# Altium PCB PCB1.PcbDoc
Units mm, origin at the board's own origin, x right, y up, seen from the top; angles counter-clockwise.
Board outline 159.1 x 114.2 mm, 2 copper layers (Top Layer, Bottom Layer); 54 components, 90 nets, 370 pads, 0 vias.
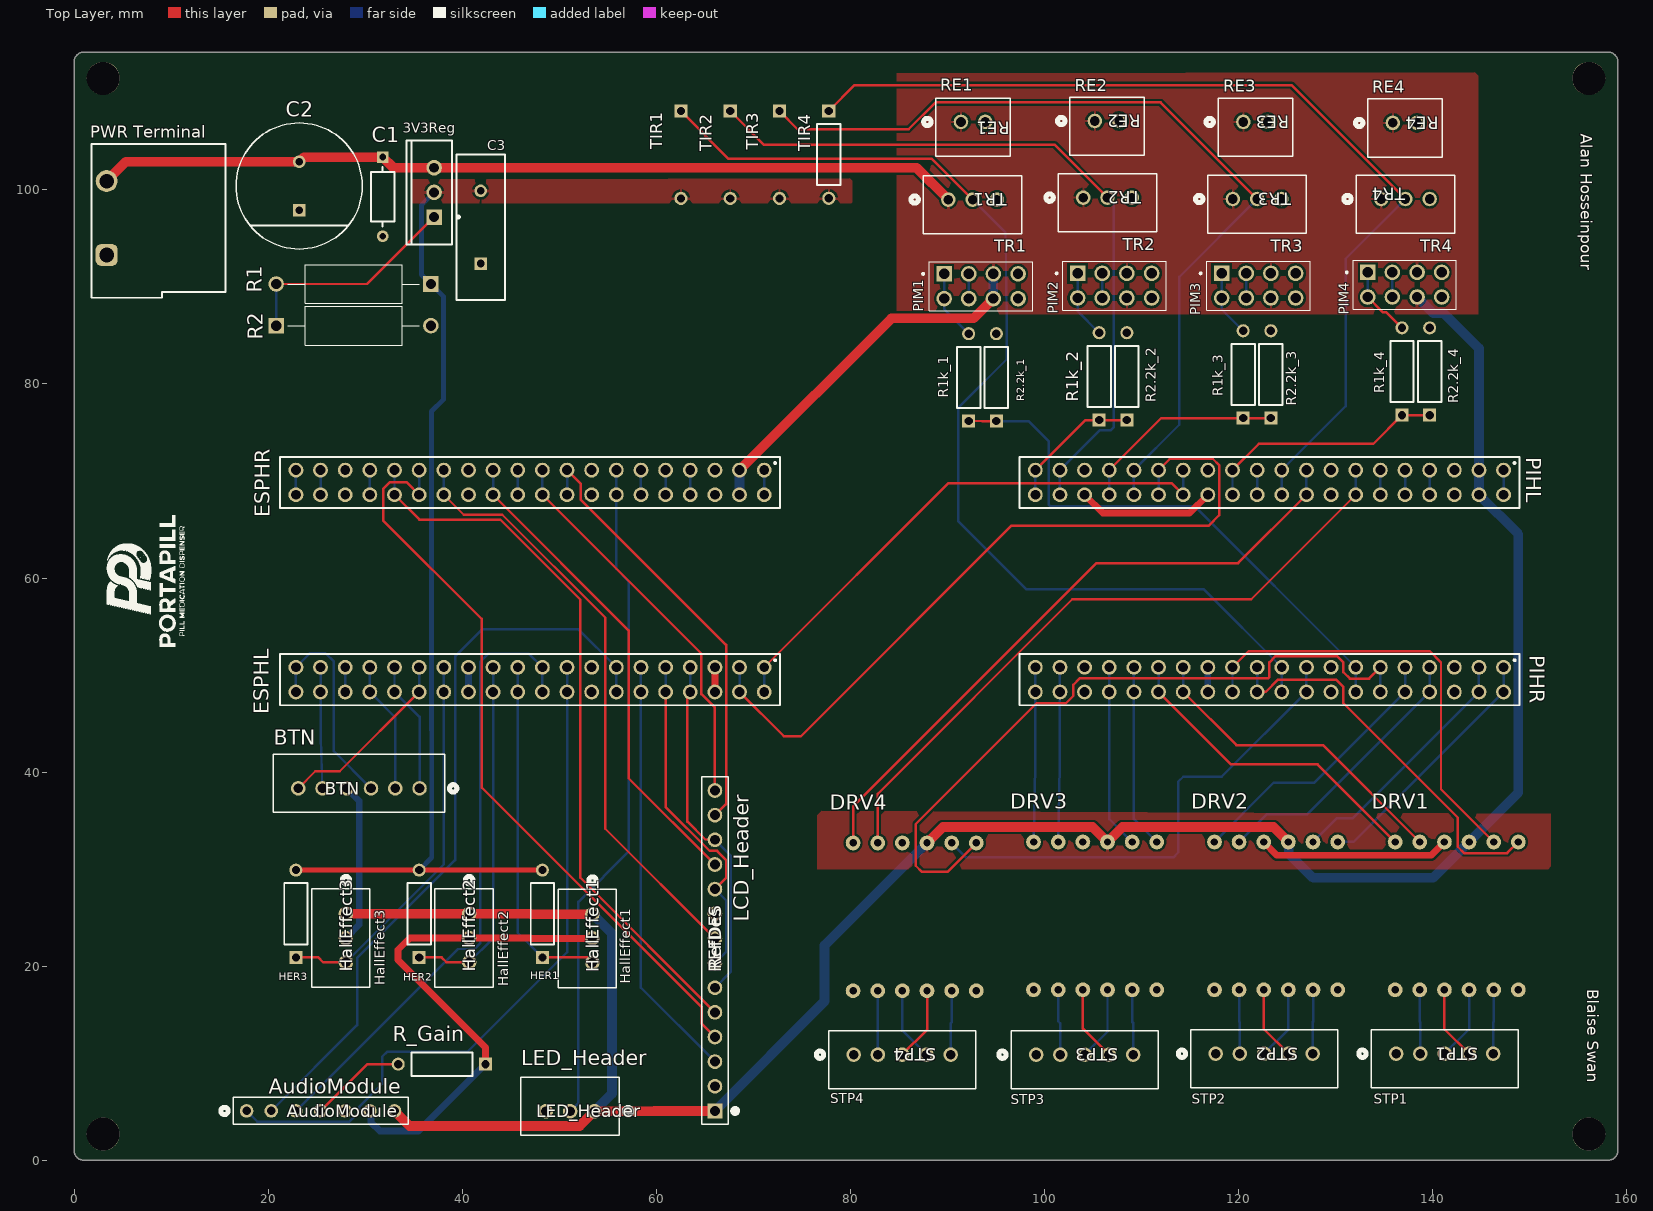
[diagram p0: Top Layer view]
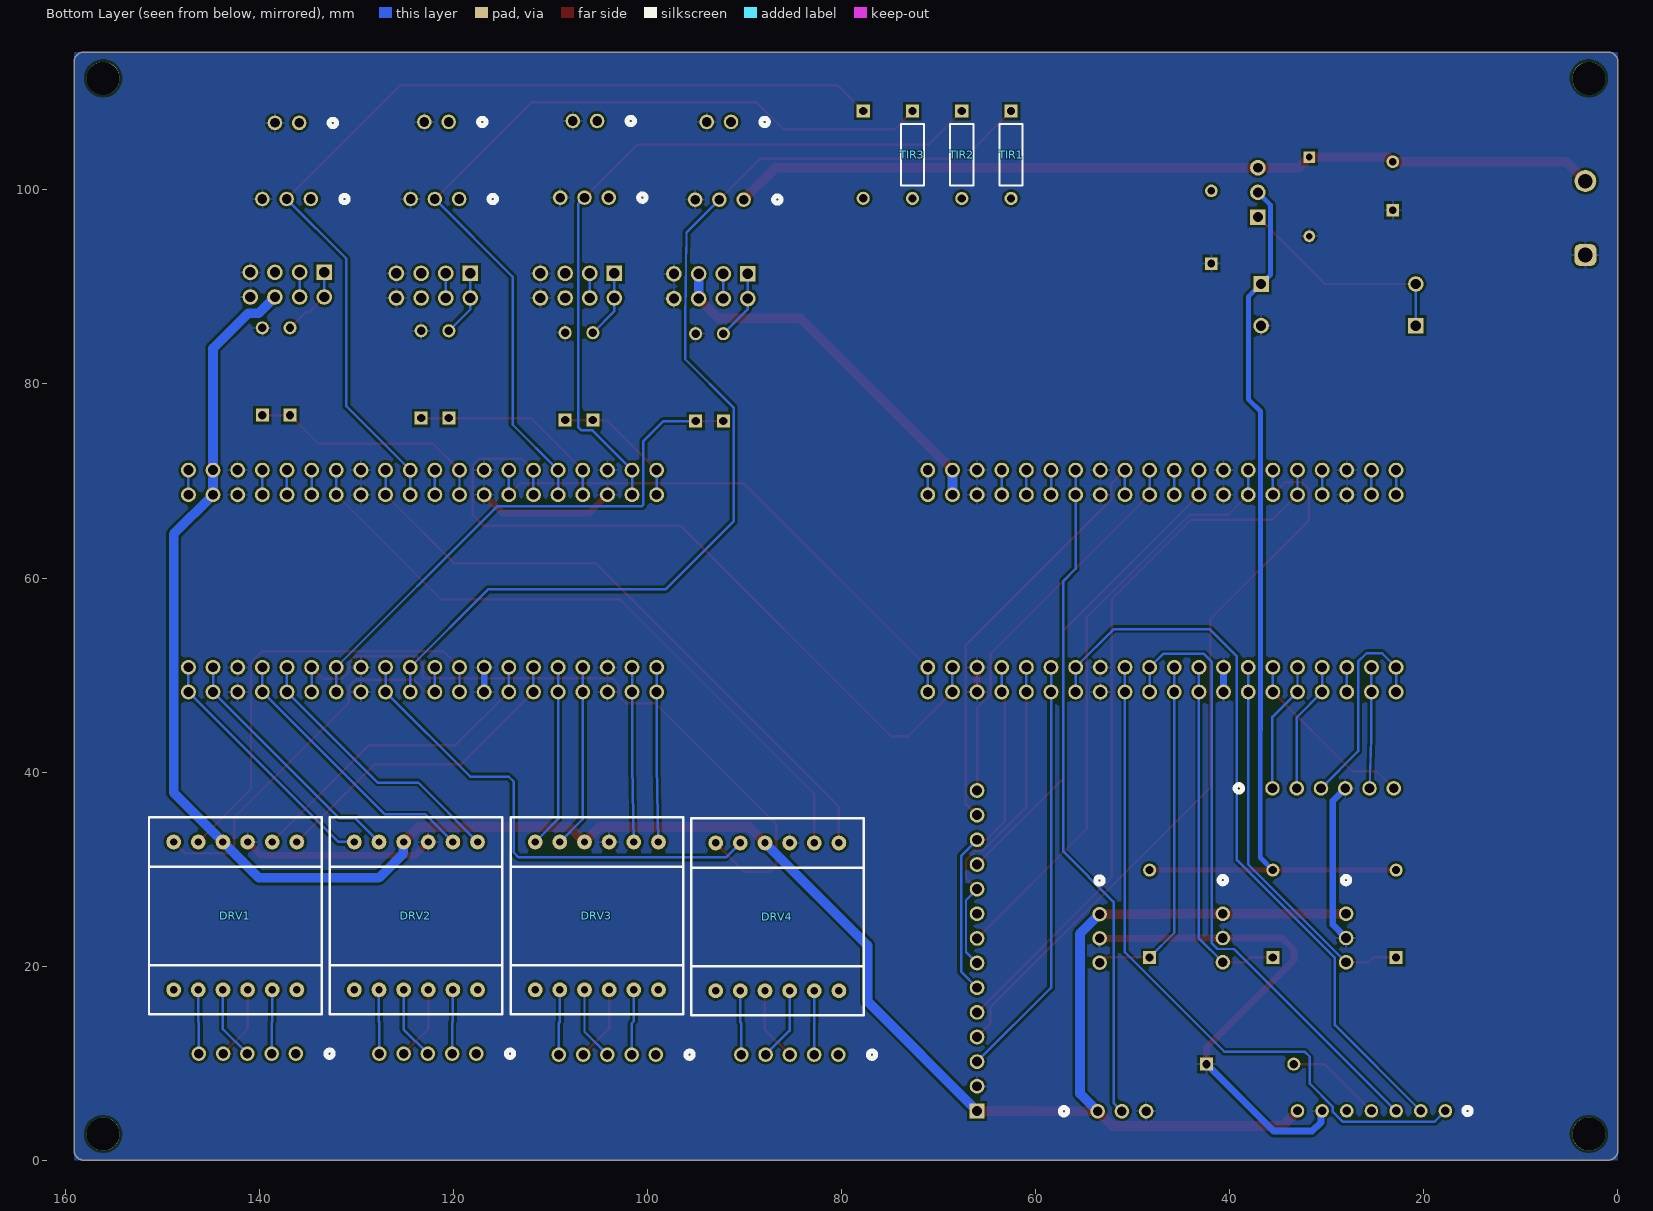
[diagram p1: Bottom Layer view, seen from below]

## Layer stack, top to bottom
Top Solder: solder mask 0.0102, Solder Resist, Dk 3.5
Top Layer: signal copper 0.0356
Dielectric 1: dielectric 0.32, FR-4, Dk 4.8
Bottom Layer: signal copper 0.0356
Bottom Solder: solder mask 0.0102, Solder Resist, Dk 3.5

## Board outline
1,0 cw(c1,1) 0,1 0,113.2 cw(c1,113.2) 1,114.2 158.1,114.2 cw(c158.1,113.2) 159.1,113.2 159.1,1 cw(c158.1,1) 158.1,0

## Design rules (kind name [scope] priority, off if disabled: settings)
Clearance [All] p1: gap=0.254 ignorepadtopadclearanceinfootprint=FALSE
PolygonConnect [All] p1: connectstyle=Relief reliefconductorwidth=0.254 reliefentries=4 polygonreliefangle="90 Angle" airgapwidth=0.254
RoutingVias [All] p1: holewidth=0.711 width=1.27 viastyle="Through Hole" minholewidth=0.711 minwidth=1.27 maxholewidth=0.711 maxwidth=1.27
SolderMaskExpansion [All] p1: expansion=0 istentingtop=FALSE
SupplyNets "Schematic Supply Nets_2" [InNet('3V3')] p1: voltage=0.000
SupplyNets "Schematic Supply Nets_1" [InNet('+5')] p2: voltage=0.000
SupplyNets "Schematic Supply Nets" [InNet('GND')] p3: voltage=0.000
Width Width_2 [InNet('GND')] p1: maxlimit=1 minlimit=0.4 preferedwidth=0.7 minimp=50.000000 maximp=50.000000 favimp=50.000000
Width Width_1 [InNet('3V3')] p2: maxlimit=0.7 minlimit=0.4 preferedwidth=0.5 minimp=50.000000 maximp=50.000000 favimp=50.000000
Width [InNet('+5')] p3: maxlimit=1.2 minlimit=0.5 preferedwidth=1 minimp=50.000000 maximp=50.000000 favimp=50.000000
30 further rules are at their usual default settings.

## Components (designator, comment, footprint, x,y, rotation, side; value= is the part's Value field where it differs from the comment)
3V3Reg "LM317AT/NOPB" NDE0003A 37.1,99.74 r90 top
AudioModule "MAX98357A" CONN07_901471107_MOL 17.78,5.08 r0 top
BTN "B6B-XH-A" CONN_B6B-XH-A_JST 35.6,38.323 r0 top
C1 "0.1uF" FP-C410C104M5U5TA7200-MFG 31.8,99.3 r270 top
C2 "100uF" FP-RAD-TH-D_12_5_0_5-L_25-MFG 23.2,100.4 r90 top
C3 "10uF" FP-DE2_D15_T5_F7_5_d0_6-0-MFG 41.9,96.15 r90 top
DRV1 "DRV8833" DRV8833 136.14,32.8 r270 bottom
DRV2 "DRV8833" DRV8833 117.52,32.8 r270 bottom
DRV3 "DRV8833" DRV8833 98.88,32.8 r270 bottom
DRV4 "DRV8833" DRV8833 80.28,32.7 r270 bottom
ESPHL "2X20 header" 61304021821 46.99,49.53 r180 top locked
ESPHR "2x20 header" 61304021821 46.99,69.85 r180 top locked
HallEffect1 "B3B-XH-A" CONN_B3B-XH-A_JST 53.417,25.36 r90 top
HallEffect2 "B3B-XH-A" CONN_B3B-XH-A_JST 40.717,25.4 r90 top
HallEffect3 "B3B-XH-A" CONN_B3B-XH-A_JST 28.017,25.4 r90 top
HER1 "10K ohms" RESA60-630X240 48.26,25.4 r90 top
HER2 "10K ohms" RESA60-630X240 35.56,25.4 r90 top
HER3 "10K ohms" RESA60-630X240 22.86,25.4 r90 top
LCD_Header "PH1-14-UA" CONN_PH1-14-UA_ADM 66.04,5.08 r90 top
LED_Header "B3B-XH-A" CONN_B3B-XH-A_JST 53.617,5.049 r0 top
PIHL "2X 20 Fe header" 61304021821 123.19,69.85 r180 top locked
PIHR "2X 20 Fe header" 61304021821 123.19,49.53 r180 top locked
PIM1 "Piezo" SULLINS_PPPC042LFBN-RC 93.47,90.07 r180 top
PIM2 "Piezo" SULLINS_PPPC042LFBN-RC 107.23,90.13 r180 top
PIM3 "Piezo" SULLINS_PPPC042LFBN-RC 122.07,90.13 r180 top
PIM4 "Piezo" SULLINS_PPPC042LFBN-RC 137.13,90.23 r180 top
"PWR Terminal" "5V" 691216400002 8.7,97.1 r90 top
R1 "240ohm" RR02_MFG 28.8,90.3 r180 top
R1k_1 "1K ohms" RESA60-630X240 92.191,80.68 r90 top
R1k_2 "1K ohms" RESA60-630X240 105.64,80.78 r90 top
R1k_3 "1K ohms" RESA60-630X240 120.48,80.98 r90 top
R1k_4 "1K ohms" RESA60-630X240 136.846,81.28 r90 top
R2 "390ohm" RR02_MFG 28.8,86 r0 top
R2.2k_1 "2.2k ohms" RESA60-630X240 95.046,80.679 r90 top
R2.2k_2 "2.2k ohms" RESA60-630X240 108.494,80.78 r90 top
R2.2k_3 "2.2k ohms" RESA60-630X240 123.334,80.98 r90 top
R2.2k_4 "2.2k ohms" RESA60-630X240 139.7,81.28 r90 top
R_Gain "100" RESA60-630X240 37.9,9.9 r180 top
RE1 "B2B-XH-A" CONN_B2B-XH-A_JST 91.4,107 r180 top
RE2 "B2B-XH-A" CONN_B2B-XH-A_JST 105.2,107.1 r180 top
RE3 "B2B-XH-A" CONN_B2B-XH-A_JST 120.5,107 r180 top
RE4 "B2B-XH-A" CONN_B2B-XH-A_JST 135.9,106.9 r180 top
STP1 "B5B-XH-A" CONN_B5B-XH-A_JST 136.24,10.98 r180 top
STP2 "B5B-XH-A" CONN_B5B-XH-A_JST 117.64,10.98 r180 top
STP3 "B5B-XH-A" CONN_B5B-XH-A_JST 99.14,10.88 r180 top
STP4 "B5B-XH-A" CONN_B5B-XH-A_JST 80.34,10.88 r180 top
TIR1 "10K ohms" RESA60-630X240 62.54,103.62 r270 bottom
TIR2 "10K ohms" RESA60-630X240 67.62,103.62 r270 bottom
TIR3 "10K ohms" RESA60-630X240 72.7,103.62 r270 bottom
TIR4 "10K ohms" RESA60-630X240 77.776,103.634 r270 top
TR1 "B3B-XH-A" CONN_B3B-XH-A_JST 90.1,99 r180 top
TR2 "B3B-XH-A" CONN_B3B-XH-A_JST 104,99.2 r180 top
TR3 "B3B-XH-A" CONN_B3B-XH-A_JST 119.42,99.06 r180 top
TR4 "B3B-XH-A" CONN_B3B-XH-A_JST 134.7,99.06 r180 top

## Footprints (in the part's own frame and the unit in brackets; to place one, negate y for a bottom-side part, rotate by r counter-clockwise, add the part's x,y. Pads: shape width x height; smd on the part's side, far side on the other; paste and mask are expansions set on the pad)
61304021821 [mm]
  round 1.53 hole 1.02: 1(-24.13,-1.27) 2(-24.13,1.27) 3(-21.59,-1.27) 4(-21.59,1.27) 5(-19.05,-1.27) 6(-19.05,1.27) 7(-16.51,-1.27) 8(-16.51,1.27) 9(-13.97,-1.27) 10(-13.97,1.27) 11(-11.43,-1.27) 12(-11.43,1.27) 13(-8.89,-1.27) 14(-8.89,1.27) 15(-6.35,-1.27) 16(-6.35,1.27) 17(-3.81,-1.27) 18(-3.81,1.27) 19(-1.27,-1.27) 20(-1.27,1.27) 21(1.27,-1.27) 22(1.27,1.27) 23(3.81,-1.27) 24(3.81,1.27) 25(6.35,-1.27) 26(6.35,1.27) 27(8.89,-1.27) 28(8.89,1.27) 29(11.43,-1.27) 30(11.43,1.27) 31(13.97,-1.27) 32(13.97,1.27) 33(16.51,-1.27) 34(16.51,1.27) 35(19.05,-1.27) 36(19.05,1.27) 37(21.59,-1.27) 38(21.59,1.27) 39(24.13,-1.27) 40(24.13,1.27)
  silkscreen extent -25.75,-2.64 25.75,2.64, body extent -25.65,-4.25 25.65,7.35, height 2.54
691216400002 [mm] "Vertical Cable Entry with Rising Cage Clamp, pitch 7.62mm, 02p"
  rrect50% 2.25x2.25 hole 1.5: 1(-3.81,5.35)
  round 2.25 hole 1.5: 2(3.81,5.35)
  silkscreen extent -8.22,-6.9 7.62,6.9, body extent -8.22,-6.9 7.62,6.9, height 9.9
CONN07_901471107_MOL [mil]
  round 55 hole 35 paste-99999 mask+0: 1(0,0) 2(100,0) 3(200,0) 4(300,0) 5(400,0) 6(500,0) 7(600,0)
  silkscreen extent -105,-55 655,55
CONN_B2B-XH-A_JST [mil]
  round 59 hole 39 paste-99999 mask+0: 1(0,0) 2(-98.43,0)
  silkscreen extent -200,-97 151,139
CONN_B3B-XH-A_JST [mil]
  round 59 hole 39 paste-99999 mask+0: 1(0,0) 2(-98.43,0) 3(-196.85,0)
  silkscreen extent -298,-97 152,139
CONN_B5B-XH-A_JST [mil]
  round 59 hole 39 paste-99999 mask+0: 1(0,0) 2(-98.42,0) 3(-196.85,0) 4(-295.28,0) 5(-393.7,0)
  silkscreen extent -495,-97 152,139
CONN_B6B-XH-A_JST [mil]
  round 59 hole 39 paste-99999 mask+0: 1(0,0) 2(-98.42,0) 3(-196.85,0) 4(-295.27,0) 5(-393.7,0) 6(-492.13,0)
  silkscreen extent -594,-97 151,139
CONN_PH1-14-UA_ADM [mil]
  rect 60x60 / inner round 60 / far side rect 60x60 hole 40 paste-99999 mask+0: 1(0,0)
  round 60 hole 40 paste-99999 mask+0: 2(100,0) 3(200,0) 4(300,0) 5(400,0) 6(500,0) 7(600,0) 8(700,0) 9(800,0) 10(900,0) 11(1000,0) 12(1100,0) 13(1200,0) 14(1300,0)
  silkscreen extent -55,-92 1355,54, body extent -50,-49 1350,49, height 335
DRV8833 [mil]
  round 60 hole 30: 1(0,0) 2(0,-100) 3(0,-200) 4(0,-300) 5(0,-400) 6(0,-500) 7(600,-500) 8(600,-400) 9(600,-300) 10(600,-200) 11(600,-100) 12(600,0)
  silkscreen extent -100,-600 700,100
FP-C410C104M5U5TA7200-MFG [mm]
  rect 1.2x1.2 hole 0.7 paste-2539.97 mask+0: 1(-4.075,0)
  round 1.2 hole 0.7 paste-2539.97 mask+0: 2(4.075,0)
  silkscreen extent -3.07,-1.21 3.08,1.2, body extent -4.77,-1.31 4.77,1.31, height 0.25
FP-DE2_D15_T5_F7_5_d0_6-0-MFG [mm]
  rect 1.3x1.3 hole 0.8 paste-2539.97 mask+0: 1(-3.75,0)
  round 1.3 hole 0.8 paste-2539.97 mask+0: 2(3.75,0)
  silkscreen extent -7.5,-2.5 7.5,2.5, body extent -7.6,-2.6 7.6,2.6, height 0.25
FP-RAD-TH-D_12_5_0_5-L_25-MFG [mm]
  rect 1.3x1.3 hole 0.8 paste-2539.97 mask+0: 1(-2.5,0)
  round 1.3 hole 0.8 paste-2539.97 mask+0: 2(2.5,0)
  silkscreen extent -6.5,-6.5 6.5,6.5, body extent -6.6,-6.6 6.6,6.6, height 0.25
NDE0003A [mm] "FM, 3-Leads, Body 10.7x4.7mm, Pitch 2.54mm"
  rect 1.6x1.6 hole 1: 1(-2.54,0)
  round 1.6 hole 1: 2(0,0) 3(2.54,0)
  silkscreen extent -5.35,-2.63 5.35,2.85, body extent -5.4,-1.9 5.4,2.9, height 19.4
RESA60-630X240 [mm] "Axial Resistor, 2-Leads, Dia 2.4mm, Body Length 6.3mm"
  rect 1.35x1.35 hole 0.85: 1(-4.5,0)
  round 1.35 hole 0.85: 2(4.5,0)
  silkscreen extent -3.15,-1.2 3.15,1.2, body extent -3.15,-1.2 3.15,1.2, height 2.4
RR02_MFG [mm] "Recommended Land Pattern"
  rect 1.6x1.6 hole 1.05 paste-2539.97 mask+0: 1(-7.97,0)
  round 1.6 hole 1.05 paste-2539.97 mask+0: 2(7.97,0)
  silkscreen extent -6.77,-2 6.77,2, body extent -8.37,-2 8.37,2, height 4
SULLINS_PPPC042LFBN-RC [mm]
  rect 1.605x1.605 / inner round 1.605 / far side rect 1.605x1.605 hole 1.07: 1(3.81,-1.27)
  round 1.605 hole 1.07: 2(3.81,1.27) 3(1.27,-1.27) 4(1.27,1.27) 5(-1.27,-1.27) 6(-1.27,1.27) 7(-3.81,-1.27) 8(-3.81,1.27)
  silkscreen extent -5.33,-2.54 6.07,2.54, body extent -5.33,-2.54 5.33,2.54, height 8.51

## Part data
3V3Reg: library part CMP-0062-02452-3, "3-Terminal Adjustable Regulator, 3-pin TO-220, Pb-Free", Manufacturer="Texas Instruments", PackageTopMarking="NSUZXYTTE#*LM317AT P+", PowerWise=N, ComponentLink1Description="Datasheet URL", ComponentLink1URL=http://www.ti.com/general/docs/lit/getliterature.tsp?genericPartNumber=LM317-N&fileType=pdf, CompType="LDO IC", PackageDescription="TO-220, Molded, 3 Lead, Straight", PackageReference=NDE0003A, PinCount=3, RoHS=Y
AudioModule: library part 901471107, "C-Grid III PC Board Connector, Single Row, Vertical, 7 Circuits, Tin (Sn) Plating", Manufacturer_Name=Molex, Copyright="Copyright (C) 2026 Ultra Librarian. All rights reserved.", Manufacturer_Part_Number=901471107, RefDes=RefDes, Type=Type
BTN HallEffect1 HallEffect2 HallEffect3 LED_Header RE1 RE2 RE3 RE4 STP1 STP2 STP3 STP4 TR1 TR2 TR3 TR4: "Description", Manufacturer_Name=JST, Copyright="Copyright (C) 2026 Ultra Librarian. All rights reserved.", RefDes=RefDes, Type=Type
  BTN: Manufacturer_Part_Number=B6B-XH-A
  HallEffect1 HallEffect2 HallEffect3 LED_Header TR1 TR2 TR3 TR4: Manufacturer_Part_Number=B3B-XH-A
  RE1 RE2 RE3 RE4: Manufacturer_Part_Number=B2B-XH-A
  STP1 STP2 STP3 STP4: Manufacturer_Part_Number=B5B-XH-A
C1: library part CMP-03020-034640-1, "C410C104M5U5TA7200 / CAP CER 0.1UF 50V Z5U AXIAL", Capacitance=100nF, Case/Package=Axial, Dielectric=Z5U, Max Operating Temperature=85°C, Min Operating Temperature=10°C, Package Quantity=5000, Tolerance=20%, Voltage Rating=50V, Construction=AXIAL, Dissipation Factor=4%, Lead Diameter=0.51mm, Lead Free="Lead Free", Lead Length=25.4mm, Length=4.32mm, Mount="Through Hole", Number of Pins=2, Packaging="Tape and Reel", Radiation Hardening=No, REACH SVHC="No SVHC", RoHS Compliant=Yes, Series="Aximax 400", Termination=Axial, Voltage Rating (DC)=50V
C2: library part CMP-05427-002077-1, "Aluminum Electrolytic Capacitors (Radial Lead Type) 100uF ±20% 160V / EEUED2C101", Case/Package=Radial, Dielectric Material=Aluminium, Max Operating Temperature=105°C, Min Operating Temperature=-25°C, Package Quantity=200, Ripple Current=1.17A, Tolerance=20%, Voltage=160V, Capacitance=100uF, Construction=RADIAL, Contact Plating=Tin, Diameter=12.5mm, Dissipation Factor=0.15%, Height=25mm, Height - Seated (Max)=0.984inch, Lead Diameter=0.6mm, Lead Free="Lead Free", Lead Pitch=5mm, Length=25mm, Life (Hours)=10000Hour, Mount="Through Hole", Packaging=Bulk, Radiation Hardening=No, REACH SVHC="No SVHC", RoHS Compliant=Yes, Series=ED, Termination=Radial, Voltage Rating=160V, Voltage Rating (DC)=160V
C3: library part CMP-06035-046229-1, "Cap Ceramic Disc 10000pF 20% 250VAC Thru-Hole 15.0x5.0x7.5 Bulk /  / DE2E3SA103MJ3BT02F"
DRV1 DRV2 DRV3 DRV4: "Motor Driver"
ESPHL ESPHR PIHL PIHR: library part 6130XX21821_61304021821, "40 Position Receptacle Connector 0.100 (2.54mm) Through Hole Gold", Package=None, Check_prices=https://www.snapeda.com/parts/61304021821/W%25C3%25BCrth+Elektronik+Midcom/view-part/?ref=eda, MF="WÃ¼rth Elektronik", MP=61304021821, SnapEDA_Link=https://www.snapeda.com/parts/61304021821/W%25C3%25BCrth+Elektronik+Midcom/view-part/?ref=snap
HER1 HER2 HER3 R1k_1 R1k_2 R1k_3 R1k_4 R2.2k_1 R2.2k_2 R2.2k_3 R2.2k_4 R_Gain TIR1 TIR2 TIR3 TIR4: library part CMP-1659-00075-1, "Axial Resistor, 1 KOhm, +/- 1%, 250 mW, -55 to 155 degC, 2-Pin THD, RoHS, Bulk", Case\Package=Axial, Max Operating Temperature="155 degC", Min Operating Temperature="-55 degC", Package Quantity=200, Power Rating="250 mW", Resistance="10 kohm", Tolerance=1%, Voltage Rating="250 V", ComponentLink1Description="Manufacturer URL", ComponentLink1URL=http://www.yageo.com/, ComponentLink2Description=Datasheet, ComponentLink2URL=http://www.yageo.com/documents/recent/Yageo%20LR_MFR_2013.pdf, DatasheetVersion=Apr-13, Length="0.248 inch", PackageDescription="2-Pin Axial Lead, Dia 2.4 mm, Body Length 6.3 mm", PackageReference=MFR-25, Packaging=Bulk, RoHSCompliant=true
LCD_Header: "Description", Manufacturer_Name="ADAM TECHNOLOGIES INC", Copyright="Copyright (C) 2025 Ultra Librarian. All rights reserved.", Manufacturer_Part_Number=PH1-14-UA, RefDes=RefDes, Type="Headers, Male Pins"
PIM1 PIM2 PIM3 PIM4: library part PPPC042LFBN-RC, "8 Position Total Dual Row 2.54 mm Pitch Straight Female Header", Package=None, Check_prices=https://www.snapeda.com/parts/PPPC042LFBNRC/Sullins/view-part/?ref=eda, MF="Sullins Connector Solutions", MP=PPPC042LFBNRC, SnapEDA_Link=https://www.snapeda.com/parts/PPPC042LFBNRC/Sullins/view-part/?ref=snap
"PWR Terminal": library part CMP-03913-78871171-2, "Terminal Block, Wtb, 2Way, 30-12Awg Rohs Compliant: Yes", Lead Pitch=7.62mm, Number of Pins=2, Packaging=Box
R1: library part CMP-06573-42564537-1, "Fixed Resistor, Metal Film, 2W, 240ohm, 500V, 5% +/-Tol, 300ppm/Cel, Through Hole Mount", Case/Package=Axial, Max Operating Temperature=235°C, Max Power Dissipation=2W, Min Operating Temperature=-55°C, Number of Resistors=1, Operating Supply Voltage=500V, Resistance=240Ω, Temperature Coefficient=300ppm/°C, Tolerance=5%, China RoHS=Compliant, ComponentLink1Description="Manufacturer's Website", ComponentLink1URL=http://www.te.com/, ComponentLink2Description="Datasheet URL", ComponentLink2URL=https://www.te.com/commerce/DocumentDelivery/DDEController?Action=srchrtrv&DocNm=3-1773449-2&DocType=Data%20Sheet&DocLang=English&DocFormat=pdf&PartCntxt=1879353-3, Composition="Metal Film", Diameter=3.5mm, ELV=Compliant, HelpURL=https://www.te.com/commerce/DocumentDelivery/DDEController?Action=srchrtrv&DocNm=3-1773449-2&DocType=Data%20Sheet&DocLang=English&DocFormat=pdf&PartCntxt=1879353-3, Introduction Date=2008-09-01, Lead Diameter=800µm, Lead Length=30mm, Length=9mm, Lifecycle Status=Production, Mount="Axial, Through Hole", Number of Terminals=2, Number of Terminations=2, Packaging="Tape & Box (TB)", Power Rating=2W, Radiation Hardening=No, REACH SVHC=Yes, RoHS=Compliant, Termination=Axial, Voltage Rating=500V, Working Voltage=500V
R2: library part CMP-06573-42564537-1, "Fixed Resistor, Metal Film, 2W, 240ohm, 500V, 5% +/-Tol, 300ppm/Cel, Through Hole Mount", Case/Package=Axial, Max Operating Temperature=235°C, Max Power Dissipation=2W, Min Operating Temperature=-55°C, Number of Resistors=1, Operating Supply Voltage=500V, Resistance=390Ω, Temperature Coefficient=300ppm/°C, Tolerance=5%, China RoHS=Compliant, ComponentLink1Description="Manufacturer's Website", ComponentLink1URL=http://www.te.com/, ComponentLink2Description="Datasheet URL", ComponentLink2URL=https://www.te.com/commerce/DocumentDelivery/DDEController?Action=srchrtrv&DocNm=3-1773449-2&DocType=Data%20Sheet&DocLang=English&DocFormat=pdf&PartCntxt=1879353-3, Composition="Metal Film", Diameter=3.5mm, ELV=Compliant, HelpURL=https://www.te.com/commerce/DocumentDelivery/DDEController?Action=srchrtrv&DocNm=3-1773449-2&DocType=Data%20Sheet&DocLang=English&DocFormat=pdf&PartCntxt=1879353-3, Introduction Date=2008-09-01, Lead Diameter=800µm, Lead Length=30mm, Length=9mm, Lifecycle Status=Production, Mount="Axial, Through Hole", Number of Terminals=2, Number of Terminations=2, Packaging="Tape & Box (TB)", Power Rating=2W, Radiation Hardening=No, REACH SVHC=Yes, RoHS=Compliant, Termination=Axial, Voltage Rating=500V, Working Voltage=500V

## Free pads (board coordinates)
  round 3.4 hole 3.4 unplated: MH1(3,2.7) MH2(156.1,2.7) MH3(156.1,111.5) MH4(3,111.5)

## Nets (pads, with @x,y where several pads share a name; then routed paths per layer and width w, separated by ;. In a path a pad name is that pad's centre, name@x,y a point inside that pad or via, vN(x,y) a via of type N, cw(c..) or ccw(c..) an arc to the next point about the centre after c; other vN are vias at no path point)
3V3: 3V3Reg.2 C3.2 HER1.2 HER2.2 HER3.2 R1.1 TIR1.2 TIR2.2 TIR3.2 TIR4.2 | length 97.8
  Top Layer w0.5: HER3.2 HER2.2 HER1.2
  Bottom Layer w0.5: HER2.2 36.855,31.195 36.855,44.298 36.83,44.323 36.83,77.165 38.075,78.41 38.075,88.995 R1.1 35.789,91.281 35.789,98.429 3V3Reg.2
+5: 3V3Reg.3 "PWR Terminal.2" AudioModule.7 C1.1 C2.2 DRV1.4 DRV2.4 DRV3.4 DRV4.4 ESPHR.3 ESPHR.4 HallEffect1.1 HallEffect2.1 HallEffect3.1 LCD_Header.1 LED_Header.1 PIHL.3 PIHL.4 PIM1.5 PIM1.6 PIM2.5 PIM2.6 PIM3.5 PIM3.6 PIM4.5 PIM4.6 RE1.1 RE2.1 RE3.1 RE4.1 TR1.1 TR2.1 TR3.1 TR4.1 | length 371.9
  Top Layer w1: 3.35,100.91 5.34,102.9 C2.2 23.675,103.375 C1.1 32.895,102.28 3V3Reg.3 86.82,102.28 TR1.1 ; HallEffect3.1 HallEffect2.1 47.041,25.4 47.081,25.36 HallEffect1.1 ; AudioModule.7 34.569,3.531 52.098,3.531 LED_Header.1 59.792,5.049 59.822,5.08 LCD_Header.1 ; ESPHR.3 84.226,86.766 92.706,86.766 PIM1.6 ; DRV4.4 89.541,34.341 104.959,34.341 DRV3.4 108.041,34.341 123.599,34.341 DRV2.4
  Bottom Layer w1: HallEffect1.1 55.429,23.349 55.429,6.861 LED_Header.1 ; LCD_Header.1 77.343,16.383 77.343,22.143 DRV4.4 ; ESPHR.4 ESPHR.3 ; PIM1.6 PIM1.5 ; DRV2.4 125.169,32.771 125.169,31.631 127.7,29.1 140.06,29.1 DRV1.4 148.844,37.884 148.844,64.516 PIHL.4 PIHL.3 144.78,83.668 141.148,87.3 140.06,87.3 PIM4.6
GND: "PWR Terminal.1" AudioModule.6 BTN.4 C1.2 C2.1 C3.1 DRV1.3 DRV2.3 DRV3.3 DRV4.3 ESPHL.5 ESPHL.6 ESPHL.15 ESPHL.16 ESPHL.25 ESPHL.26 ESPHR.5 ESPHR.6 ESPHR.15 ESPHR.16 ESPHR.25 ESPHR.26 ESPHR.35 ESPHR.36 HallEffect1.2 HallEffect2.2 HallEffect3.2 LCD_Header.2 LED_Header.3 PIHL.5 PIHL.6 PIHL.15 PIHL.16 PIHL.25 PIHL.26 PIHL.35 PIHL.36 PIHR.5 PIHR.6 PIHR.15 PIHR.16 PIHR.25 PIHR.26 PIHR.35 PIHR.36 PIM1.7 PIM1.8 PIM2.7 PIM2.8 PIM3.7 PIM3.8 PIM4.7 PIM4.8 R2.2 R2.2k_1.2 R2.2k_2.2 R2.2k_3.2 R2.2k_4.2 R_Gain.1 RE1.2 RE2.2 RE3.2 RE4.2 TR1.3 TR2.3 TR3.3 TR4.3 | length 110.5
  Top Layer w0.7: R_Gain.1 42.4,11.625 33.39,20.635 33.39,21.69 34.6,22.9 HallEffect2.2 47.041,22.9 47.081,22.86 HallEffect1.2 ; ESPHL.6 ESPHL.5 ; PIHL.36 106.017,66.703 114.963,66.703 PIHL.26 ; DRV2.3 123.98,31.42 139.84,31.42 DRV1.3
  Bottom Layer w0.7: HallEffect3.2 29.388,24.27 29.388,37.035 BTN.4 ; AudioModule.6 30.613,4.947 30.613,3.897 31.51,3 35.5,3 R_Gain.1 ; ESPHL.26 ESPHL.25 ; PIHR.26 PIHR.25
Net3V3Reg_1: 3V3Reg.1 R1.2 R2.1 | length 23.4
  Top Layer w0.254: R1.2 30.2,90.3 3V3Reg.1
  Bottom Layer w0.254: R2.1 R1.2
NetAudioModule_1: AudioModule.1 ESPHL.17 ESPHL.18 | length 72
  Bottom Layer w0.254: AudioModule.1 18.872,3.988 28.374,3.988 29.4,5.014 29.4,5.527 31.75,7.877 31.75,10.668 32.283,11.201 40.564,11.201 50.8,21.438 ESPHL.18 ESPHL.17
NetAudioModule_2: AudioModule.2 ESPHL.13 ESPHL.14 | length 76.6
  Bottom Layer w0.254: AudioModule.2 29.159,13.919 29.159,20.823 39.268,30.932 39.268,51.918 42.088,54.737 51.943,54.737 ESPHL.13 ESPHL.14
NetAudioModule_3: AudioModule.3 ESPHL.19 ESPHL.20 | length 65
  Bottom Layer w0.254: AudioModule.3 39.548,21.768 41.264,21.768 41.848,22.352 41.848,51.361 42.672,52.186 46.874,52.186 ESPHL.19 ESPHL.20
NetAudioModule_4: AudioModule.4 R_Gain.2 | length 10
  Top Layer w0.254: AudioModule.4 30.22,9.9 R_Gain.2
NetBTN_1: BTN.1 ESPHL.31 ESPHL.32 | length 13.5
  Bottom Layer w0.254: ESPHL.31 ESPHL.32 35.6,45.68 BTN.1
NetBTN_2: BTN.2 ESPHL.33 ESPHL.34 | length 13.6
  Bottom Layer w0.254: ESPHL.33 ESPHL.34 33.1,45.64 BTN.2
NetBTN_3: BTN.3 ESPHL.39 ESPHL.40 | length 22.1
  Bottom Layer w0.254: ESPHL.40 ESPHL.39 24.308,52.248 25.908,52.248 26.772,51.384 26.772,42.151 BTN.3
NetBTN_5: BTN.5 ESPHL.37 ESPHL.38 | length 12.5
  Bottom Layer w0.254: ESPHL.37 ESPHL.38 25.4,43.507 BTN.5
NetBTN_6: BTN.6 ESPHL.29 ESPHL.30 | length 19.1
  Top Layer w0.254: BTN.6 24.859,40.081 27.381,40.081 ESPHL.30
  Bottom Layer w0.254: ESPHL.30 ESPHL.29
NetDRV1_IN1: DRV1.6 PIHR.21 PIHR.22 | length 40.6
  Top Layer w0.254: PIHR.22 122.812,48.26 124.082,49.53 130.048,49.53 130.81,48.768 130.81,47.092 142.596,35.306 142.596,32.309 143.256,31.648 147.688,31.648 DRV1.6
  Bottom Layer w0.254: PIHR.22 PIHR.21
NetDRV1_IN2: DRV1.5 PIHR.23 PIHR.24 | length 45.9
  Top Layer w0.254: PIHR.23 121.034,52.454 139.722,52.454 140.868,51.308 140.868,38.232 DRV1.5
  Bottom Layer w0.254: PIHR.24 PIHR.23
NetDRV1_IN3: DRV1.2 PIHR.27 PIHR.28 | length 33.3
  Top Layer w0.254: PIHR.28 119.786,42.774 128.706,42.774 DRV1.2
  Bottom Layer w0.254: PIHR.28 PIHR.27
NetDRV1_IN4: DRV1.1 PIHR.29 PIHR.30 | length 33.3
  Top Layer w0.254: PIHR.30 119.228,40.792 128.148,40.792 DRV1.1
  Bottom Layer w0.254: PIHR.30 PIHR.29
NetDRV1_OUT1: DRV1.11 STP1.2 | length 6.6
  Bottom Layer w0.254: DRV1.11 138.68,14.284 138.74,14.224 STP1.2
NetDRV1_OUT2: DRV1.10 STP1.4 | length 7.6
  Top Layer w0.254: DRV1.10 141.22,13.5 STP1.4
NetDRV1_OUT3: DRV1.9 STP1.3 | length 7.6
  Bottom Layer w0.254: STP1.3 143.76,13.5 DRV1.9
NetDRV1_OUT4: DRV1.8 STP1.5 | length 6.6
  Bottom Layer w0.254: STP1.5 146.24,14.224 146.3,14.284 DRV1.8
NetDRV2_IN1: DRV2.6 PIHR.1 PIHR.2 | length 26
  Bottom Layer w0.254: DRV2.6 131.86,32.8 PIHR.2 PIHR.1
NetDRV2_IN2: DRV2.5 PIHR.3 PIHR.4 | length 26
  Bottom Layer w0.254: DRV2.5 130.11,35.23 131.75,35.23 PIHR.4 PIHR.3
NetDRV2_IN3: DRV2.2 PIHR.7 PIHR.8 | length 28.6
  Bottom Layer w0.254: DRV2.2 122.896,35.636 127.076,35.636 PIHR.8 PIHR.7
NetDRV2_IN4: DRV2.1 PIHR.9 PIHR.10 | length 28.6
  Bottom Layer w0.254: DRV2.1 123.633,38.913 127.813,38.913 PIHR.10 PIHR.9
NetDRV2_OUT1: DRV2.11 STP2.2 | length 6.6
  Bottom Layer w0.254: DRV2.11 120.06,14.304 120.14,14.224 STP2.2
NetDRV2_OUT2: DRV2.10 STP2.4 | length 7.6
  Top Layer w0.254: DRV2.10 122.6,13.52 STP2.4
NetDRV2_OUT3: DRV2.9 STP2.3 | length 7.6
  Bottom Layer w0.254: STP2.3 125.14,13.48 DRV2.9
NetDRV2_OUT4: DRV2.8 STP2.5 | length 6.6
  Bottom Layer w0.254: STP2.5 127.64,14.249 127.68,14.289 DRV2.8
NetDRV3_IN1: DRV3.6 PIHR.31 PIHR.32 | length 19
  Bottom Layer w0.254: PIHR.31 PIHR.32 109.22,35.16 DRV3.6
NetDRV3_IN2: DRV3.5 PIHR.33 PIHR.34 | length 19
  Bottom Layer w0.254: PIHR.33 PIHR.34 106.68,35.16 DRV3.5
NetDRV3_IN3: DRV3.2 PIHR.37 PIHR.38 | length 18
  Bottom Layer w0.254: DRV3.2 101.6,40.718 PIHR.38 PIHR.37
NetDRV3_IN4: DRV3.1 PIHR.39 PIHR.40 | length 18
  Bottom Layer w0.254: DRV3.1 99.06,40.718 PIHR.40 PIHR.39
NetDRV3_OUT1: DRV3.11 STP3.2 | length 6.8
  Bottom Layer w0.254: DRV3.11 101.42,14.317 101.64,14.097 STP3.2
NetDRV3_OUT2: DRV3.10 STP3.4 | length 7.8
  Top Layer w0.254: DRV3.10 103.96,13.56 STP3.4
NetDRV3_OUT3: DRV3.9 STP3.3 | length 7.7
  Bottom Layer w0.254: STP3.3 106.5,13.24 DRV3.9
NetDRV3_OUT4: DRV3.8 STP3.5 | length 6.7
  Bottom Layer w0.254: DRV3.8 109.04,14.248 109.14,14.148 STP3.5
NetDRV4_IN1: DRV4.6 PIHR.11 PIHR.12 | length 73.2
  Top Layer w0.254: DRV4.6 89.998,29.718 87.376,29.718 86.741,30.353 86.741,34.646 99.187,47.092 102.21,47.092 102.969,47.851 102.969,48.991 103.632,49.654 123.063,49.654 123.19,49.781 123.19,51.308 123.828,51.946 130.147,51.946 130.81,51.283 130.81,50.292 131.47,49.632 133.452,49.632 PIHR.11
  Bottom Layer w0.254: PIHR.12 PIHR.11
NetDRV4_IN2: DRV4.5 PIHR.17 PIHR.18 | length 51
  Bottom Layer w0.254: DRV4.5 91.923,31.217 113.284,31.217 113.792,31.725 113.792,39.014 114.3,39.522 118.262,39.522 PIHR.18 PIHR.17
NetDRV4_IN3: DRV4.2 PIHL.13 PIHL.14 | length 69.6
  Top Layer w0.254: DRV4.2 82.82,37.76 102.87,57.81 121.31,57.81 PIHL.14
  Bottom Layer w0.254: PIHL.14 PIHL.13
NetDRV4_IN4: DRV4.1 PIHL.17 PIHL.18 | length 66.3
  Top Layer w0.254: DRV4.1 80.28,36.44 105.385,61.544 119.964,61.544 PIHL.18
  Bottom Layer w0.254: PIHL.18 PIHL.17
NetDRV4_OUT1: DRV4.11 STP4.2 | length 6.6
  Bottom Layer w0.254: DRV4.11 82.82,14.168 82.84,14.148 STP4.2
NetDRV4_OUT2: DRV4.10 STP4.4 | length 7.6
  Bottom Layer w0.254: DRV4.10 85.36,13.36 STP4.4
NetDRV4_OUT3: DRV4.9 STP4.3 | length 7.6
  Top Layer w0.254: STP4.3 87.9,13.44 DRV4.9
NetDRV4_OUT4: DRV4.8 STP4.5 | length 6.6
  Bottom Layer w0.254: STP4.5 90.34,14.097 90.44,14.197 DRV4.8
NetESPHL_1: ESPHL.1 ESPHL.2 PIHL.27 PIHL.28 | length 56.6
  Top Layer w0.254: ESPHL.1 90.068,69.748 113.132,69.748 PIHL.28
  Bottom Layer w0.254: ESPHL.2 ESPHL.1 ; PIHL.28 PIHL.27
NetESPHL_3: ESPHL.3 ESPHL.4 PIHL.29 PIHL.30 | length 78
  Top Layer w0.254: ESPHL.4 73.152,43.688 74.905,43.688 96.622,65.405 116.942,65.405 118.008,66.472 118.008,71.628 117.348,72.288 112.928,72.288 PIHL.29
  Bottom Layer w0.254: ESPHL.4 ESPHL.3 ; PIHL.30 PIHL.29
NetESPHL_7: ESPHL.7 ESPHL.8 LCD_Header.6 LCD_Header.12 | length 36.3
  Top Layer w0.254: ESPHL.8 63.5,47.915 63.2,47.615 63.2,34.9 65.046,33.054 66.006,33.054 LCD_Header.12
  Bottom Layer w0.254: ESPHL.8 ESPHL.7 ; LCD_Header.6 67.691,19.431 67.691,31.369 LCD_Header.12
NetESPHL_9: ESPHL.9 ESPHL.10 LCD_Header.7 LCD_Header.10 | length 34.9
  Top Layer w0.254: ESPHL.10 60.96,36.422 65.505,31.877 66.259,31.877 67.183,30.953 67.183,29.083 LCD_Header.10
  Bottom Layer w0.254: ESPHL.10 ESPHL.9 ; LCD_Header.7 67.183,21.463 67.183,26.797 LCD_Header.10
NetESPHL_11: ESPHL.11 ESPHL.12 LCD_Header.3 | length 43.8
  Bottom Layer w0.254: ESPHL.11 ESPHL.12 58.42,17.78 LCD_Header.3
NetESPHL_21: ESPHL.21 ESPHL.22 HallEffect1.3 HER1.1 | length 36.3
  Top Layer w0.254: HER1.1 52.877,20.9 HallEffect1.3
  Bottom Layer w0.254: ESPHL.21 ESPHL.22 45.72,23.44 HER1.1
NetESPHL_23: ESPHL.23 ESPHL.24 HallEffect2.3 HER2.1 | length 36.8
  Top Layer w0.254: HER2.1 37.871,20.9 38.371,20.4 HallEffect2.3
  Bottom Layer w0.254: HallEffect2.3 43.18,22.863 ESPHL.24 ESPHL.23
NetESPHL_27: ESPHL.27 ESPHL.28 HallEffect3.3 HER3.1 | length 39.9
  Top Layer w0.254: HER3.1 25.171,20.9 25.671,20.4 HallEffect3.3
  Bottom Layer w0.254: HallEffect3.3 38.1,30.483 ESPHL.28 ESPHL.27
NetESPHL_35: ESPHL.35 ESPHL.36 | length 2.5
  Bottom Layer w0.254: ESPHL.36 ESPHL.35
NetESPHR_1: ESPHR.1 ESPHR.2 | length 2.5
  Bottom Layer w0.254: ESPHR.2 ESPHR.1
NetESPHR_7: ESPHR.7 ESPHR.8 | length 2.5
  Bottom Layer w0.254: ESPHR.8 ESPHR.7
NetESPHR_9: ESPHR.9 ESPHR.10 | length 2.5
  Bottom Layer w0.254: ESPHR.10 ESPHR.9
NetESPHR_11: ESPHR.11 ESPHR.12 | length 2.5
  Bottom Layer w0.254: ESPHR.12 ESPHR.11
NetESPHR_13: ESPHR.13 ESPHR.14 LED_Header.2 | length 69.1
  Bottom Layer w0.254: LED_Header.2 51.968,5.901 51.968,26.619 57.15,31.801 57.15,59.69 55.88,60.96 ESPHR.14 ESPHR.13
NetESPHR_17: ESPHR.17 ESPHR.18 LCD_Header.13 | length 45.4
  Top Layer w0.254: ESPHR.17 52.194,69.726 52.194,68.105 67.186,53.113 67.186,36.706 LCD_Header.13
  Bottom Layer w0.254: ESPHR.18 ESPHR.17
NetESPHR_19: ESPHR.19 ESPHR.20 LCD_Header.14 | length 40.4
  Top Layer w0.254: ESPHR.20 64.646,52.194 64.646,48.033 66.04,46.639 LCD_Header.14
  Bottom Layer w0.254: ESPHR.20 ESPHR.19
NetESPHR_21: ESPHR.21 ESPHR.22 | length 2.5
  Bottom Layer w0.254: ESPHR.22 ESPHR.21
NetESPHR_23: ESPHR.23 ESPHR.24 LCD_Header.11 | length 50.1
  Top Layer w0.254: ESPHR.24 57.15,54.61 57.15,39.37 LCD_Header.11
  Bottom Layer w0.254: ESPHR.24 ESPHR.23
NetESPHR_27: ESPHR.27 ESPHR.28 LCD_Header.8 | length 62.2
  Top Layer w0.254: ESPHR.28 40.157,66.523 44.127,66.523 54.734,55.916 54.734,34.166 LCD_Header.8
  Bottom Layer w0.254: ESPHR.28 ESPHR.27
NetESPHR_29: ESPHR.29 ESPHR.30 LCD_Header.4 | length 77.7
  Top Layer w0.254: ESPHR.30 34.29,69.85 32.512,69.85 31.852,69.19 31.852,65.938 42.012,55.778 42.012,38.405 64.694,15.723 64.694,14.046 LCD_Header.4
  Bottom Layer w0.254: ESPHR.30 ESPHR.29
NetESPHR_31: ESPHR.31 ESPHR.32 LCD_Header.5 | length 74.4
  Top Layer w0.254: ESPHR.32 35.585,66.015 43.917,66.015 52.172,57.76 52.172,29.108 LCD_Header.5
  Bottom Layer w0.254: ESPHR.32 ESPHR.31
NetESPHR_33: ESPHR.33 ESPHR.34 | length 2.5
  Bottom Layer w0.254: ESPHR.34 ESPHR.33
NetESPHR_37: ESPHR.37 ESPHR.38 | length 2.5
  Bottom Layer w0.254: ESPHR.38 ESPHR.37
NetESPHR_39: ESPHR.39 ESPHR.40 | length 2.5
  Bottom Layer w0.254: ESPHR.40 ESPHR.39
NetPIHL_1: PIHL.1 PIHL.2 | length 2.5
  Bottom Layer w0.254: PIHL.2 PIHL.1
NetPIHL_7: PIHL.7 PIHL.8 | length 2.5
  Bottom Layer w0.254: PIHL.8 PIHL.7
NetPIHL_9: PIHL.9 PIHL.10 | length 2.5
  Bottom Layer w0.254: PIHL.10 PIHL.9
NetPIHL_11: PIHL.11 PIHL.12 | length 2.5
  Bottom Layer w0.254: PIHL.12 PIHL.11
NetPIHL_19: PIHL.19 PIHL.20 TIR4.1 TR4.2 | length 101.1
  Top Layer w0.254: TIR4.1 80.436,110.795 125.465,110.795 TR4.2
  Bottom Layer w0.254: PIHL.20 PIHL.19 131.039,77.699 131.039,92.899 TR4.2
NetPIHL_21: PIHL.21 PIHL.22 | length 2.5
  Bottom Layer w0.254: PIHL.22 PIHL.21
NetPIHL_23: PIHL.23 PIHL.24 R1k_4.1 R2.2k_4.1 | length 25.2
  Top Layer w0.254: PIHL.23 122.098,73.838 133.904,73.838 R1k_4.1 R2.2k_4.1
  Bottom Layer w0.254: PIHL.24 PIHL.23
NetPIHL_31: PIHL.31 PIHL.32 TIR3.1 TR3.2 | length 91
  Top Layer w0.254: TIR3.1 74.572,106.248 86.004,106.248 88.773,109.017 111.963,109.017 TR3.2
  Bottom Layer w0.254: PIHL.32 PIHL.31 113.894,75.794 113.894,91.034 TR3.2
NetPIHL_33: PIHL.33 PIHL.34 R1k_3.1 R2.2k_3.1 | length 21.4
  Top Layer w0.254: PIHL.33 112.04,76.48 R1k_3.1 R2.2k_3.1
  Bottom Layer w0.254: PIHL.34 PIHL.33
NetPIHL_37: PIHL.37 PIHL.38 TIR2.1 TR2.2 | length 76.4
  Top Layer w0.254: TIR2.1 71.067,104.673 101.027,104.673 TR2.2
  Bottom Layer w0.254: PIHL.38 PIHL.37 105.689,75.209 106.807,75.209 107.163,75.565 107.163,98.537 TR2.2
NetPIHL_39: PIHL.39 PIHL.40 R1k_2.1 R2.2k_2.1 | length 14.1
  Top Layer w0.254: PIHL.39 104.22,76.28 R1k_2.1 R2.2k_2.1
  Bottom Layer w0.254: PIHL.40 PIHL.39
NetPIHR_13: PIHR.13 PIHR.14 R1k_1.1 R2.2k_1.1 | length 56.8
  Top Layer w0.254: R1k_1.1 93.599,76.18 ; 93.6,76.179 R2.2k_1.1
  Bottom Layer w0.254: R2.2k_1.1 98.37,76.179 100.432,74.117 100.432,67.564 100.584,67.412 115.468,67.412 PIHR.13 PIHR.14
NetPIHR_19: PIHR.19 PIHR.20 TIR1.1 TR1.2 | length 112.6
  Top Layer w0.254: TIR1.1 67.46,103.2 88.4,103.2 TR1.2
  Bottom Layer w0.254: TR1.2 95.987,95.613 96.114,86.69 96.114,82.55 91.135,77.572 91.135,65.837 98.146,58.826 116.434,58.826 PIHR.19 PIHR.20
NetPIM1_1: PIM1.1 PIM1.2 R1k_1.2 | length 7.2
  Bottom Layer w0.254: PIM1.1 PIM1.2 89.66,87.711 R1k_1.2
NetPIM1_3: PIM1.3 PIM1.4 | length 2.5
  Bottom Layer w0.254: PIM1.4 PIM1.3
NetPIM2_1: PIM2.1 PIM2.2 R1k_2.2 | length 7
  Bottom Layer w0.254: PIM2.1 PIM2.2 103.42,87.5 R1k_2.2
NetPIM2_3: PIM2.3 PIM2.4 | length 2.5
  Bottom Layer w0.254: PIM2.4 PIM2.3
NetPIM3_1: PIM3.1 PIM3.2 R1k_3.2 | length 6.8
  Bottom Layer w0.254: PIM3.1 PIM3.2 118.26,87.7 R1k_3.2
NetPIM3_3: PIM3.3 PIM3.4 | length 2.5
  Bottom Layer w0.254: PIM3.4 PIM3.3
NetPIM4_1: PIM4.1 PIM4.2 R1k_4.2 | length 7.4
  Top Layer w0.254: PIM4.2 134.904,87.376 135.25,87.376 R1k_4.2
  Bottom Layer w0.254: PIM4.2 PIM4.1
NetPIM4_3: PIM4.3 PIM4.4 | length 2.5
  Bottom Layer w0.254: PIM4.4 PIM4.3
pads on no net: AudioModule.5 DRV1.7 DRV1.12 DRV2.7 DRV2.12 DRV3.7 DRV3.12 DRV4.7 DRV4.12 LCD_Header.9 STP1.1 STP2.1 STP3.1 STP4.1

## Polygon pours and split planes (outlines as drawn)
+5 on Top Layer "+5_L01_P002" (solid, pour order 2): 84.8,112 84.8,87.2 144.7,87.2 144.7,112.1
+5 on Top Layer "+5_L01_P001" (solid, pour order 1): 76.7,36 76.6,35.9 76.6,30 151.9,30 152.2,30.3 152.2,35.7
3V3 on Top Layer "3V3_L01_P005" (solid, pour order 5): 34.8,101.1 34.8,98.6 80.1,98.6 80.2,98.7 80.2,101.2
GND on Bottom Layer "GND_L02_P000" (solid, pour order 0): 0,114.2 0,0 159.1,0 159.1,114.2

## Silkscreen, mask and mechanical layers (free items; w line width, h text height)
Top Overlay:
  drawing of 34 lines, arcs and shapes, not listed
  text "Alan Hosseinpour" at 154.856,105.8 h2 r270
  text "Blaise Swan" at 155.522,17.6 h2 r270
Mechanical 1:
  the board outline again, w0.254

## Text inside footprints (layer, text, board x,y; h text height)
LCD_Header: Top Overlay "RefDes" at 66.675,19.685 h1.27 r90; Top Overlay "REFDES" at 66.675,19.367 h1.27 r90; Mechanical 13 "RefDes2" at 66.675,19.367 h1.27 r90